# Altium PCB PCB_meu1oarm_2022-08-20.pcbdoc (part 1 of 2)
Units mil, origin at the board's own origin, x right, y up, seen from the top; angles counter-clockwise.
Board outline 4310.32 x 3211.34 mil, 2 copper layers (Top Layer, Bottom Layer); 105 components, 150 nets, 526 pads, 319 vias.
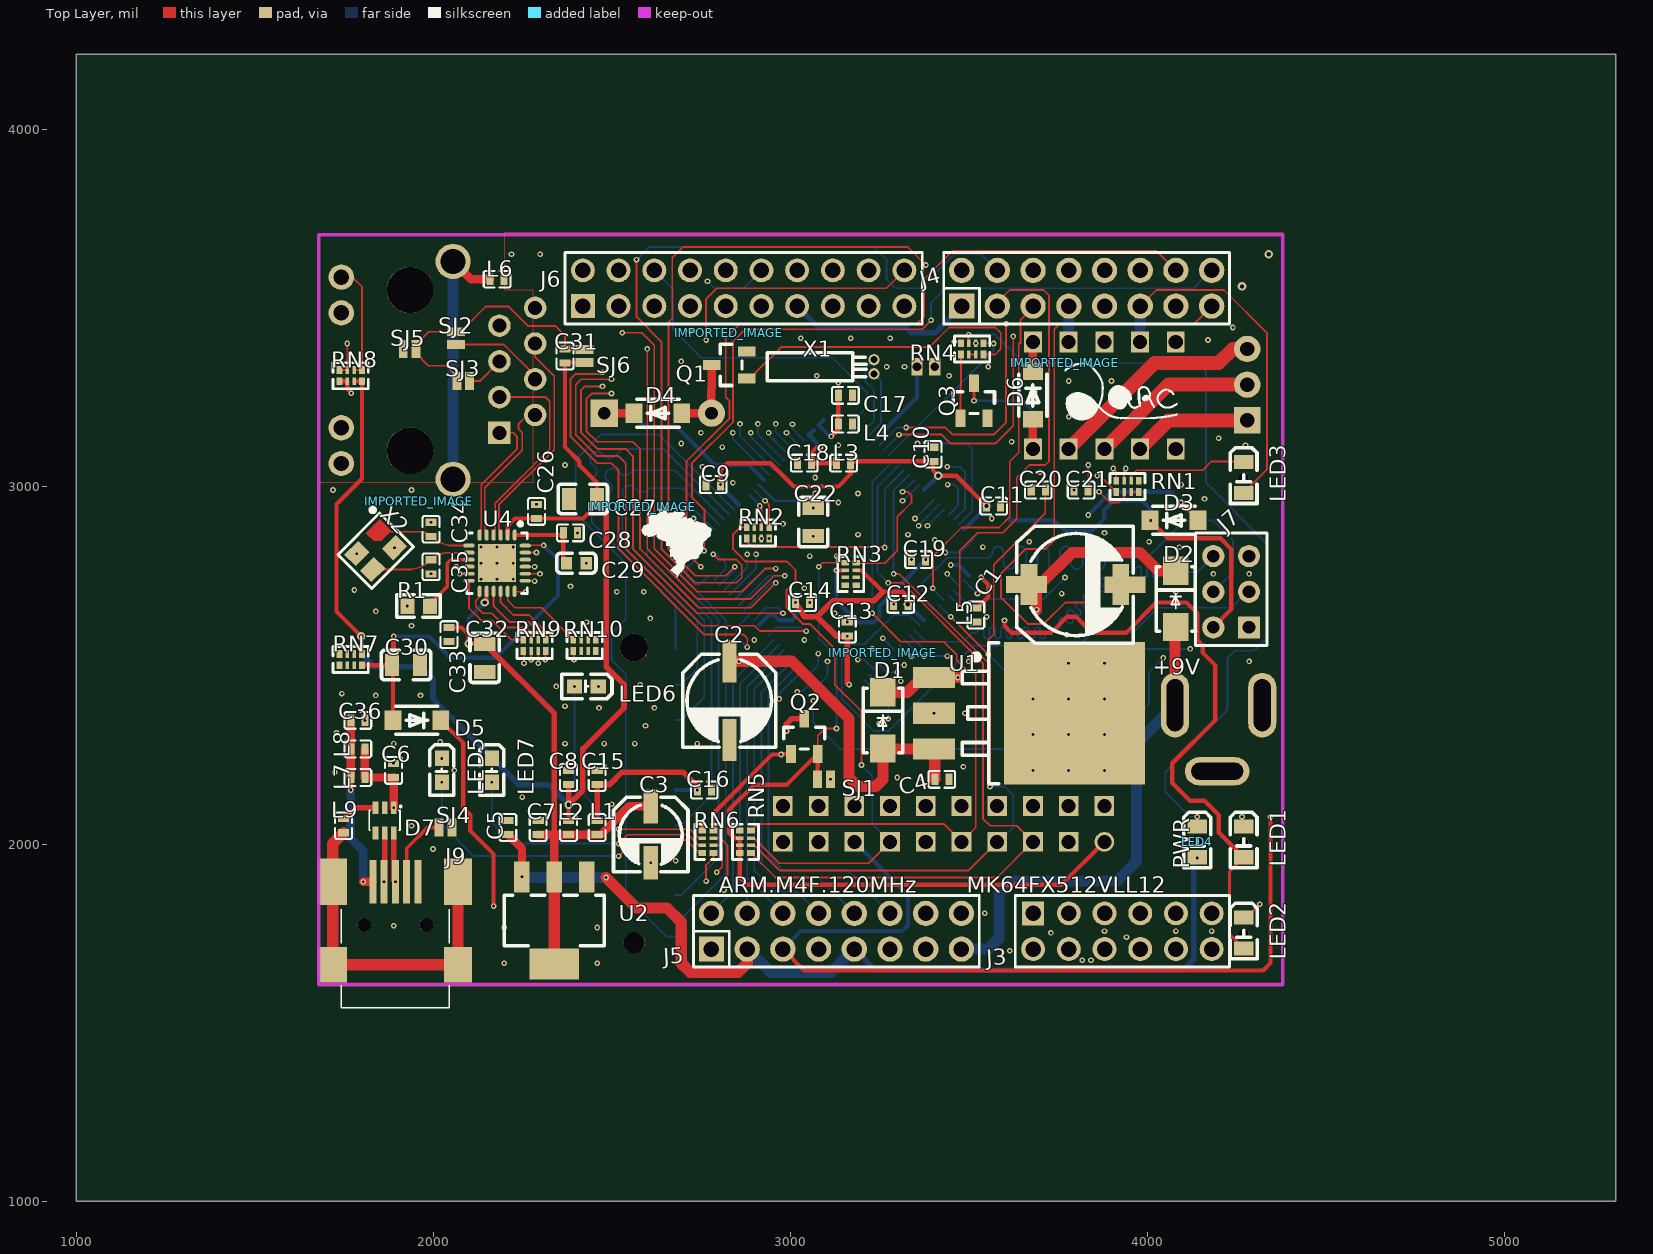
[diagram p0: Top Layer view]
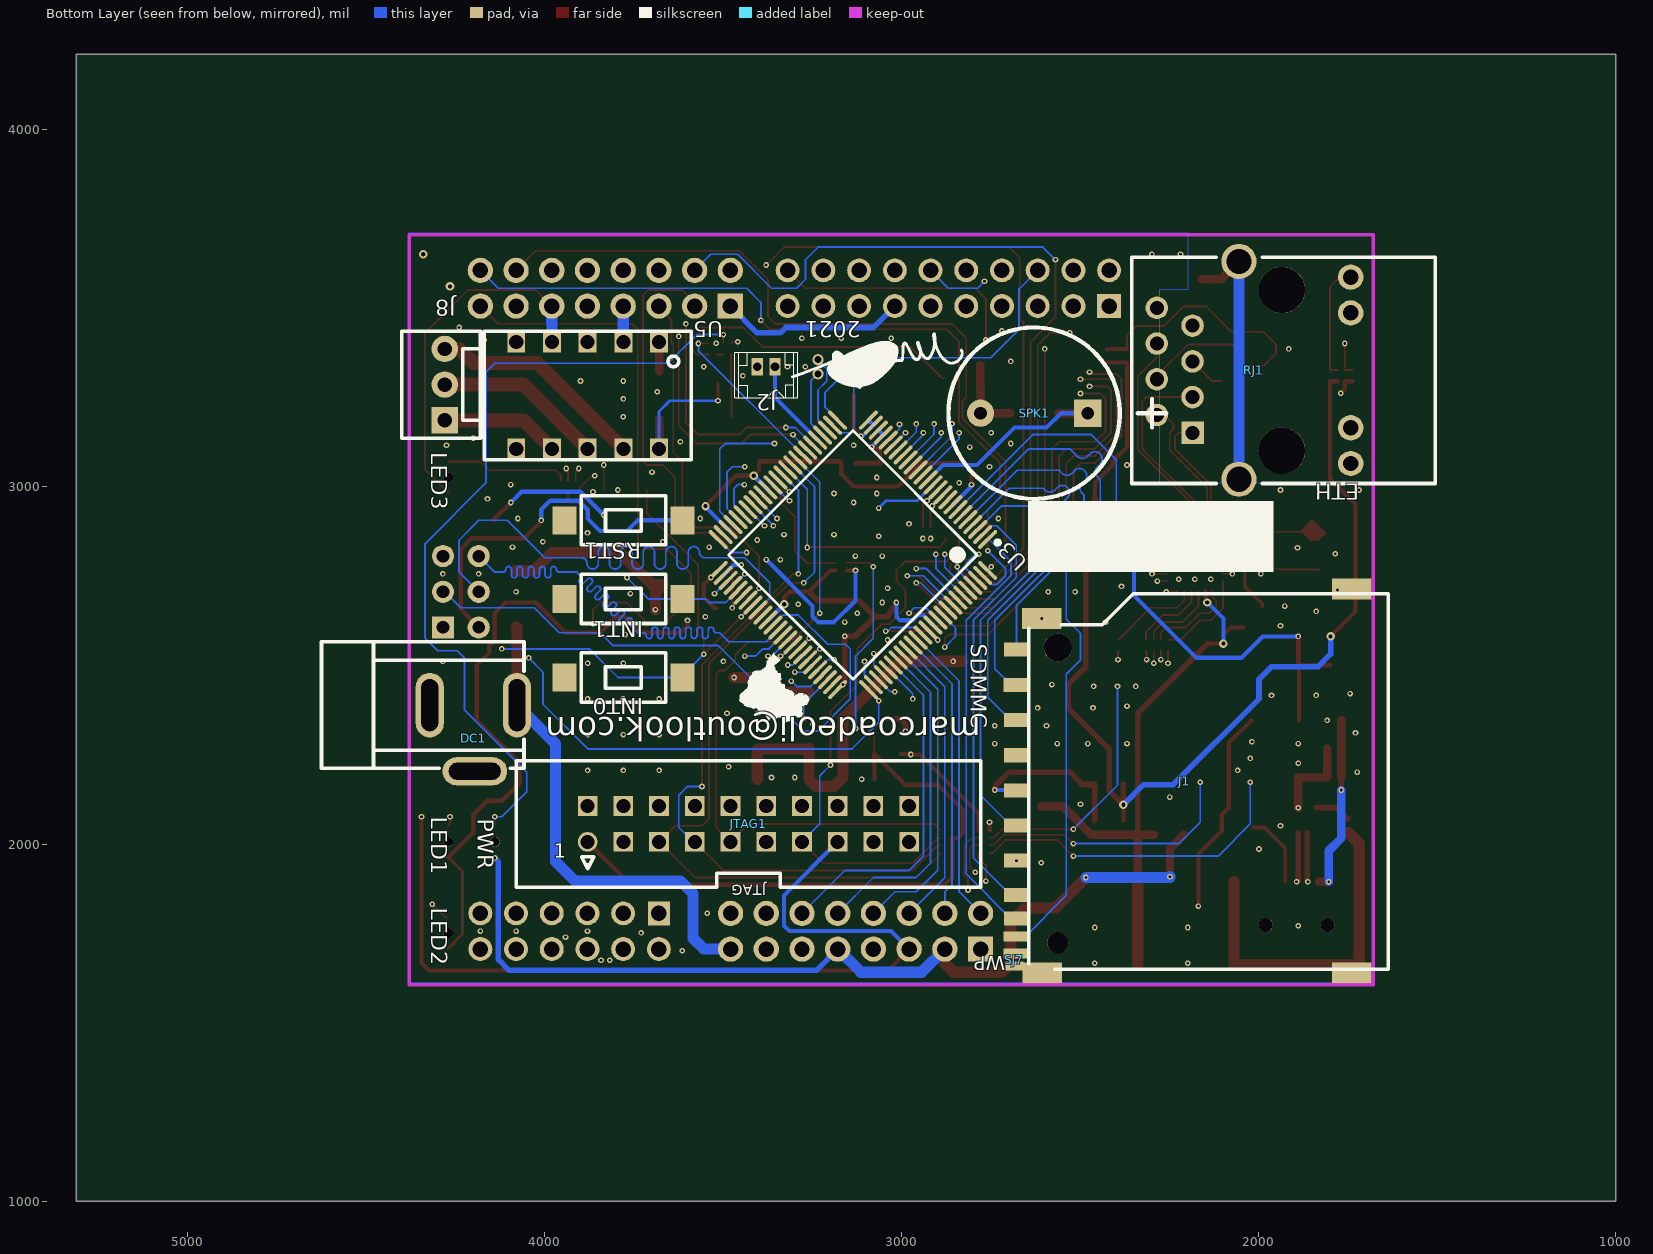
[diagram p1: Bottom Layer view, seen from below]

## Layer stack, top to bottom
Top Layer: signal copper (thickness not stored)
Dielectric: dielectric 12.6, FR-4, Dk 4.8
Bottom Layer: signal copper (thickness not stored)

## Board outline
5310.32,1000 1000,1000 1000,4211.34 5310.32,4211.34

## Components (designator, comment, footprint, x,y, rotation, side; value= is the part's Value field where it differs from the comment)
C1 "47uF/35V" CAP-SMD_BD8.0-L8.5-W8.5-FD 3798.47,2726.34 r0 top
C2 "220uF" CAP-SMD_BD6.3-L6.6-W6.6-FD 2828.47,2401.34 r270 top
C3 "330uF" CAP-SMD_BD5.0-L5.3-W5.3-FD 2608.47,2026.34 r270 top
C4 "100nF" C0402 3423.47,2181.34 r180 top
C5 "100nF" C0402 2208.47,2046.34 r270 top
C6 "100nF" C0402 1888.46,2206.34 r270 top
C7 "100nF" C0402 2293.47,2046.34 r270 top
C8 "100nF" C0402 2378.47,2186.34 r270 top
C9 "100nF" C0402 2783.47,3006.34 r0 top
C10 "100nF" C0402 3398.47,3091.34 r270 top
C11 "100nF" C0402 3568.47,2946.34 r180 top
C12 "100nF" C0402 3308.47,2671.34 r0 top
C13 "100nF" C0402 3158.78,2601.66 r270 top
C14 "100nF" C0402 3033.78,2676.34 r180 top
C15 "100nF" C0402 2458.47,2186.34 r270 top
C16 "100nF" C0402 2758.47,2151.34 r180 top
C17 "100nF" C0402 3153.47,3256.34 r0 top
C18 "100nF" C0402 3038.47,3066.34 r0 top
C19 "100nF" C0402 3358.47,2796.34 r0 top
C20 "100nF" C0402 3693.47,2991.34 r0 top
C21 "100nF" C0402 3813.47,2991.34 r0 top
C22 "10uF" C0805 3063.47,2901.34 r90 top
C26 "100nF" C0402 2288.78,2931.34 r270 top
C27 "22uF" C0805 2418.47,2966.34 r180 top
C28 "100nF" C0402 2383.47,2871.34 r0 top
C29 "2.2uF" C0603 2400.24,2786.14 r0 top
C30 "10uF" C0805 1923.46,2501.34 r0 top
C31 "100nF" C0402 2368.47,3366.34 r270 top
C32 "22uF" C0805 2143.47,2521.34 r90 top
C33 "100nF" C0402 2043.46,2586.34 r90 top
C34 "22pF" C0402 1993.46,2881.34 r270 top
C35 "22pF" C0402 1993.46,2776.34 r90 top
C36 "10nF" C0402 1788.46,2346.34 r180 top
D1 "1N4001" SMA_L4.4-W2.6-LS5.0-RD 3258.47,2346.34 r270 top
D2 "1N4001" SMA_L4.4-W2.6-LS5.0-RD 4078.47,2686.34 r270 top
D3 "1N4148W" SOD-123_L2.8-W1.8-LS3.7-RD 4073.47,2906.34 r0 top
D4 "1N4148W" SOD-123_L2.8-W1.8-LS3.7-RD 2628.47,3206.34 r0 top
D5 "1N4148W" SOD-123_L2.8-W1.8-LS3.7-RD 1953.46,2346.34 r180 top
D6 "1N4148W" SOD-123_L2.8-W1.8-LS3.7-RD 3678.47,3256.34 r270 top
D7 "SMF05CT1G" SOT-363_L2.0-W1.3-P0.65-LS2.1-TL 1863.46,2066.34 r270 top
DC1 "dc-005 5.5-2.0" DC-IN-TH_DC005 4198.47,2296.34 r0 bottom
IMPORTED_IMAGE "IMPORTED_IMAGE" IMPORTED_IMAGE 3258.37,2535.44 r0 top
IMPORTED_IMAGE "IMPORTED_IMAGE" IMPORTED_IMAGE 2826.24,3432.12 r0 top
IMPORTED_IMAGE "IMPORTED_IMAGE" IMPORTED_IMAGE 1958.78,2959.76 r0 top
IMPORTED_IMAGE "IMPORTED_IMAGE" IMPORTED_IMAGE 2583.37,2943.77 r0 top
IMPORTED_IMAGE "IMPORTED_IMAGE" IMPORTED_IMAGE 3768.04,3347.13 r0 top
INT0 "1TS002B-2500-4300 SMD Push" SW-SMD-3.5X6X4.3-A 3778.47,2466.34 r90 bottom
INT1 "1TS002B-2500-4300 SMD Push" SW-SMD-3.5X6X4.3-A 3778.47,2686.34 r90 bottom
J1 "HYC12-SD11-275" SD-SMD_HYC12-SD11-275 2208.47,2176.34 r270 bottom
J2 "53047-02" MOLEX_53047-0210_2PIN_VERT 3378.47,3336.34 r180 bottom
J3 "HEADER-FEMALE-2.54_2X6 COPY" HDR-TH_12P-P2.54-V-R2-C6-S2.54 3929.01,1756.03 r180 top
J4 "Header-Female-2.54_2x8" HDR-TH_16P-P2.54-V-R2-C8-S2.54 3828.97,3556.24 r0 top
J5 "Header-Female-2.54_2x8" HDR-TH_16P-P2.54-V-R2-C8-S2.54 3128.36,1756.04 r0 top
J6 "HEADER-FEMALE-2.54_2X10" HDR-TH_20P-P2.54-V-R2-C10-S2.54 2868.47,3556.24 r0 top
J7 "Header-Female-2.54_2x3" HDR-3X2/2.54 4233.47,2706.34 r90 top
J8 "M03POLAR" MOLEX-1X3 4278.47,3286.34 r270 bottom
J9 "DS1104-BN0SR" DS1104BN0SR 1893.46,1541.34 r0 top
JTAG1 "JTAG" 2X10_2.54MM_PTH 3428.47,2056.34 r0 bottom
L1 "18nH" L0402 2458.47,2046.34 r90 top
L2 "18nH" L0402 2378.47,2046.34 r90 top
L3 "18nH" L0402 3148.47,3066.34 r0 top
L4 "18nH" L0402 3153.47,3176.34 r0 top
L5 "18nH" L0402 3518.47,2641.34 r90 top
L6 "18nH" L0402 2178.47,3581.34 r180 top
L7 "18nH" L0402 1788.46,2186.34 r0 top
L8 "18nH" L0402 1788.46,2266.34 r0 top
L9 "18nH" L0402 1748.46,2051.34 r270 top
LED1 "XL-0805QBC" LED0805-RD 4268.47,2006.34 r270 top
LED2 "XL-0805QBC" LED0805-RD 4268.66,1751.33 r270 top
LED3 "XL-0805QBC" LED0805-RD 4268.47,3026.34 r270 top
LED4 "XL-0805QBC" LED0805-RD 4138.47,2006.34 r270 top
LED5 "0603White light_C2290" LED0603-R-RD 2023.46,2206.34 r270 top
LED6 "0603White light_C2290" LED0603-R-RD 2428.47,2441.34 r180 top
LED7 "0603White light_C2290" LED0603-R-RD 2163.47,2206.34 r270 top
Q1 "SS8050_C2150" SOT-23-3_L2.9-W1.3-P1.90-LS2.4-BR 2828.47,3341.34 r0 top
Q2 "SS8050_C2150" SOT-23-3_L2.9-W1.3-P1.90-LS2.4-BR 3038.47,2301.34 r270 top
Q3 "SS8050_C2150" SOT-23-3_L2.9-W1.3-P1.90-LS2.4-BR 3513.47,3241.34 r270 top
R1 "6.49K" R0603 1958.46,2666.34 r0 top
RJ1 "HR911105A_C12074" RJ45-TH_HR911105A 2013.46,3326.34 r270 bottom
RN1 "1K" RES-ARRAY-SMD_0402-8P-L2.0-W1.0-BL 3943.47,3001.34 r0 top
RN2 "33" RES-ARRAY-SMD_0402-8P-L2.0-W1.0-BL 2908.47,2871.34 r0 top
RN3 "10K" RES-ARRAY-SMD_0402-8P-L2.0-W1.0-BL 3168.47,2756.34 r270 top
RN4 "1K" RES-ARRAY-SMD_0402-8P-L2.0-W1.0-BL 3508.47,3386.34 r0 top
RN5 "10K" RES-ARRAY-SMD_0402-8P-L2.0-W1.0-BL 2873.47,2006.34 r90 top
RN6 "1K" RES-ARRAY-SMD_0402-8P-L2.0-W1.0-BL 2768.47,2006.34 r90 top
RN7 "10K" RES-ARRAY-SMD_0402-8P-L2.0-W1.0-BL 1768.46,2516.34 r0 top
RN8 "1K" RES-ARRAY-SMD_0402-8P-L2.0-W1.0-BL 1768.46,3311.34 r180 top
RN9 "33" RES-ARRAY-SMD_0402-8P-L2.0-W1.0-BL 2283.47,2556.34 r180 top
RN10 "33" RES-ARRAY-SMD_0402-8P-L2.0-W1.0-BL 2423.47,2556.34 r0 top
RST1 "1TS002B-2500-4300 SMD Push" SW-SMD-3.5X6X4.3-A 3778.47,2906.34 r90 bottom
SJ1 "JUMPER-PAD-2-NO" PAD-JUMPER-2-NO_NO_SILK#1 3093.47,2181.34 r0 top
SJ2 "JUMPER-PAD-2-NO" PAD-JUMPER-2-NO_NO_SILK#1 2063.47,3416.34 r270 top
SJ3 "JUMPER-PAD-2-NO" PAD-JUMPER-2-NO_NO_SILK#1 2083.47,3296.34 r0 top
SJ4 "ID" PAD-JUMPER-2-NO_NO_SILK#1 2033.46,2046.34 r180 top
SJ5 "JUMPER-PAD-2-NO" PAD-JUMPER-2-NO_NO_SILK#1 1933.46,3386.34 r180 top
SJ6 "JUMPER-PAD-2-NO" PAD-JUMPER-2-NO_NO_SILK#1 2423.47,3366.34 r270 top
SJ7 "JUMPER-PAD-2-NO" PAD-JUMPER-2-NO_NO_SILK#2 2683.78,1676.34 r270 bottom
SPK1 "BUZZER" BUZZER 2628.47,3206.34 r180 bottom
U1 "LM2940S-5.0/TR" ? 3598.47,2366.34 r180 top
U2 "AMS1117-3.3" SOT-223-3_L6.5-W3.4-P2.30-LS7.0-BR 2338.47,1786.34 r90 top
U3 "MK64FX512VLL12" LQFP-100_14X14X05P 2758.47,2766.34 r135 bottom
U4 "KSZ8081RNAIA-TR" QFN-24_L4.0-W4.0-P0.50-BL-EP2.6 2178.33,2786.39 r180 top
U5 "MQ2RC5V" MQ2RC 3828.42,3256.22 r90 bottom
X1 "32.768KHz" OSC-TH_BD2.0-P0.70-D0.3 3233.47,3336.34 r0 top
X2 "25MHz" OSC-SMD_4P-L3.2-W2.5-BL 1838.33,2821.39 r225 top

## Footprints (in the part's own frame and the unit in brackets; to place one, negate y for a bottom-side part, rotate by r counter-clockwise, add the part's x,y. Pads: shape width x height; smd on the part's side, far side on the other; paste and mask are expansions set on the pad)
2X10_2.54MM_PTH [mil]
  round 55.1 hole 39.4: 1(450,50)
  rect 55.1x55.1 hole 39.4: 2(450,-50) 3(350,50) 4(350,-50) 5(250,50) 6(250,-50) 7(150,50) 8(150,-50) 9(50,50) 10(50,-50) 11(-50,50) 12(-50,-50) 13(-150,50) 14(-150,-50) 15(-250,50) 16(-250,-50) 17(-350,50) 18(-350,-50) 19(-450,50) 20(-450,-50)
  silkscreen extent -650,-177 650,177
BUZZER [mil]
  rect 76x76 hole 36: 1(150,0)
  round 76 hole 36: 2(-150,0)
  silkscreen extent -240,-240 370,240
C0402 [mm]
  rect 0.5x0.8 smd: 1(-0.5,0) 2(0.5,0)
  silkscreen extent -0.95,-0.6 0.95,0.6
C0603 [mm]
  rect 0.8x0.9 smd: 1(-0.7,0) 2(0.7,0)
  silkscreen extent -1.4,-0.7 1.4,0.72
C0805 [mm]
  rect 1x1.55 smd: 1(-1,0) 2(1,0)
  silkscreen extent -1.75,-1.04 1.75,1.04
CAP-SMD_BD5.0-L5.3-W5.3-FD [mm]
  rect 2.4x1 smd: 1(-2,0) 2(2,0)
  silkscreen extent -2.65,-2.65 2.65,2.65
CAP-SMD_BD6.3-L6.6-W6.6-FD [mm]
  rect 3x1 smd: 1(-2.8,0) 2(2.8,0)
  silkscreen extent -3.3,-3.3 3.3,3.3
CAP-SMD_BD8.0-L8.5-W8.5-FD [mm]
  rect 2.9x1.2 smd: 1(-3.5,0.005) 2(3.5,-0.005)
  rect 1.2x2.9 smd: 1(-3.327,0) 2(3.2,0)
  silkscreen extent -4.21,-4.16 4.1,4.15
DC-IN-TH_DC005 [mm]
  oval 2x4.6 hole 1.2 slot 3.7 at 90 deg: 1(-3.1,-2.35) 2(3.1,-2.35)
  oval 4.6x2 hole 1.2 slot 3.7 at 0 deg: 3(-0.1,2.35)
  silkscreen extent -3.6,-6.85 10.8,2.15
DS1104BN0SR [mm]
  rect 0.5x3.1 smd: 1(-1.6,8.97) 2(-0.8,8.97) 3(0,8.97) 4(0.8,8.97) 5(1.6,8.97)
  rect 2x3.3 smd: 6(-4.45,8.97) 7(4.45,8.97)
  rect 2x2.5 smd: 8(-4.45,3.07) 9(4.45,3.07)
  round 1 hole 1 unplated: ""(-2.2,5.9) ""(2.2,5.9)
  silkscreen extent -3.85,0 3.85,7
HDR-3X2/2.54 [mil]
  rect 62x62 hole 35: 1(-100,-50)
  round 62 hole 35: 2(-100,50) 3(0,-50) 4(0,50) 5(100,-50) 6(100,50)
  silkscreen extent -150,-100 165,100
HDR-TH_12P-P2.54-V-R2-C6-S2.54 [mm]
  rect 1.575x1.7 hole 1.1: 1(6.35,-1.27)
  round 1.7 hole 1.1: 2(-6.35,1.27) 3(-3.81,-1.27) 4(-3.81,1.27) 5(-1.27,-1.27) 6(-1.27,1.27) 7(1.27,-1.27) 8(1.27,1.27) 9(3.81,-1.27) 10(3.81,1.27) 11(-6.35,-1.27) 12(6.35,1.27)
  silkscreen extent -7.62,-2.54 7.62,2.54
HDR-TH_16P-P2.54-V-R2-C8-S2.54 [mm]
  rect 1.8x1.8 hole 1.1: 1(-8.89,-1.27)
  round 1.8 hole 1.1: 2(-8.89,1.27) 3(-6.35,-1.27) 4(-6.35,1.27) 5(-3.81,-1.27) 6(-3.81,1.27) 7(-1.27,-1.27) 8(-1.27,1.27) 9(1.27,-1.27) 10(1.27,1.27) 11(3.81,-1.27) 12(3.81,1.27) 13(6.35,-1.27) 14(6.35,1.27) 15(8.89,-1.27) 16(8.89,1.27)
  silkscreen extent -10.16,-2.54 10.16,2.54
HDR-TH_20P-P2.54-V-R2-C10-S2.54 [mm]
  rect 1.7x1.7 hole 1.1: 1(-11.43,-1.27)
  round 1.7 hole 1.1: 2(-11.43,1.27) 3(-8.89,-1.27) 4(-8.89,1.27) 5(-6.35,-1.27) 6(-6.35,1.27) 7(-3.81,-1.27) 8(-3.81,1.27) 9(-1.27,-1.27) 10(-1.27,1.27) 11(1.27,-1.27) 12(1.27,1.27) 13(3.81,-1.27) 14(3.81,1.27) 15(6.35,-1.27) 16(6.35,1.27) 17(8.89,-1.27) 18(8.89,1.27) 19(11.43,-1.27) 20(11.43,1.27)
  silkscreen extent -12.7,-2.54 12.7,2.54
IMPORTED_IMAGE [mil]
L0402 [mm]
  rect 0.5x0.8 smd: 1(-0.5,0) 2(0.5,0)
  silkscreen extent -0.95,-0.6 0.95,0.6
LED0603-R-RD [mil]
  rect 43x39 smd: 1(33.5,0) 2(-33.5,0)
  silkscreen extent -72,-34 70,34
LED0805-RD [mm]
  rect 1x1.4 smd: 1(-1.1,0) 2(1.1,0)
  silkscreen extent -2.1,-0.95 1.85,0.95
LQFP-100_14X14X05P [mm]
  oval 1.8x0.28 smd: 1(1.55,1.55) 2(1.55,2.05) 3(1.55,2.55) 4(1.55,3.05) 5(1.55,3.55) 6(1.55,4.05) 7(1.55,4.55) 8(1.55,5.05) 9(1.55,5.55) 10(1.55,6.05) 11(1.55,6.55) 12(1.55,7.05) 13(1.55,7.55) 14(1.55,8.05) 15(1.55,8.55) 16(1.55,9.05) 17(1.55,9.55) 18(1.55,10.05) 19(1.55,10.55) 20(1.55,11.05) 21(1.55,11.55) 22(1.55,12.05) 23(1.55,12.55) 24(1.55,13.05) 25(1.55,13.55) 51(-13.55,13.55) 52(-13.55,13.05) 53(-13.55,12.55) 54(-13.55,12.05) 55(-13.55,11.55) 56(-13.55,11.05) 57(-13.55,10.55) 58(-13.55,10.05) 59(-13.55,9.55) 60(-13.55,9.05) 61(-13.55,8.55) 62(-13.55,8.05) 63(-13.55,7.55) 64(-13.55,7.05) 65(-13.55,6.55) 66(-13.55,6.05) 67(-13.55,5.55) 68(-13.55,5.05) 69(-13.55,4.55) 70(-13.55,4.05) 71(-13.55,3.55) 72(-13.55,3.05) 73(-13.55,2.55) 74(-13.55,2.05) 75(-13.55,1.55)
  oval 0.28x1.8 smd: 26(0,15.1) 27(-0.5,15.1) 28(-1,15.1) 29(-1.5,15.1) 30(-2,15.1) 31(-2.5,15.1) 32(-3,15.1) 33(-3.5,15.1) 34(-4,15.1) 35(-4.5,15.1) 36(-5,15.1) 37(-5.5,15.1) 38(-6,15.1) 39(-6.5,15.1) 40(-7,15.1) 41(-7.5,15.1) 42(-8,15.1) 43(-8.5,15.1) 44(-9,15.1) 45(-9.5,15.1) 46(-10,15.1) 47(-10.5,15.1) 48(-11,15.1) 49(-11.5,15.1) 50(-12,15.1) 76(-12,0) 77(-11.5,0) 78(-11,0) 79(-10.5,0) 80(-10,0) 81(-9.5,0) 82(-9,0) 83(-8.5,0) 84(-8,0) 85(-7.5,0) 86(-7,0) 87(-6.5,0) 88(-6,0) 89(-5.5,0) 90(-5,0) 91(-4.5,0) 92(-4,0) 93(-3.5,0) 94(-3,0) 95(-2.5,0) 96(-2,0) 97(-1.5,0) 98(-1,0) 99(-0.5,0) 100(0,0)
  silkscreen extent -12.25,0.75 2.05,13.8
MOLEX-1X3 [mil]
  rect 74x74 hole 40: 1(100,0)
  round 74 hole 40: 2(0,0) 3(-100,0)
  silkscreen extent -150,-120 150,100
MOLEX_53047-0210_2PIN_VERT [mil]
  rect 32x50 hole 24: 1(24.6,0) 2(-24.6,0)
  silkscreen extent -89,-87 89,39
MQ2RC [mm]
  rect 1.5x1.27 hole 1: 1(3.81,-3.81) 2(3.809,-1.27) 3(3.809,1.27) 4(3.809,3.81) 5(3.809,6.35) 6(-3.811,6.35) 7(-3.811,3.81) 8(-3.811,1.27) 9(-3.811,-1.27) 10(-3.81,-3.81)
  silkscreen extent -4.57,-6.1 4.57,8.64
OSC-SMD_4P-L3.2-W2.5-BL [mm]
  round 0 smd: 1(-1.1,-0.8)
  rect 1.4x1.15 smd: 2(1.1,-0.8) 3(1.1,0.8) 4(-1.1,0.8)
  Top Layer region: -1.8,-0.225 -0.762,-0.225 -0.4,-0.604 -0.4,-1.375 -1.8,-1.375
  silkscreen extent -2.1,-2.35 2.1,1.7
OSC-TH_BD2.0-P0.70-D0.3 [mm]
  round 0.8 hole 0.5: 1(0,0.5) 2(0,-0.5)
  silkscreen extent -7.6,-1 -0.54,1
PAD-JUMPER-2-NO_NO_SILK#1 [mil]
  rect 25x50 smd: 1(-18,0) 2(18,0)
PAD-JUMPER-2-NO_NO_SILK#2 [mil]
  rect 25x50 smd: 1(18,0) 2(-18,0)
QFN-24_L4.0-W4.0-P0.50-BL-EP2.6 [mm]
  oval 0.28x0.8 smd: 1(-1.25,-2) 2(-0.75,-2) 3(-0.25,-2) 4(0.25,-2) 5(0.75,-2) 6(1.25,-2) 13(1.25,2) 14(0.75,2) 15(0.25,2) 16(-0.25,2) 17(-0.75,2) 18(-1.242,2)
  oval 0.8x0.28 smd: 7(2,-1.25) 8(2,-0.75) 9(2,-0.25) 10(2,0.25) 11(2,0.75) 12(2,1.25) 19(-2,1.25) 20(-2,0.75) 21(-2,0.25) 22(-2,-0.25) 23(-2,-0.75) 24(-2,-1.25)
  rect 2.7x2.7 smd: 25(0.013,0)
  silkscreen extent -2.14,-3.05 2.16,2.15
R0603 [mm]
  rect 1x1.1 smd: 1(-0.8,0) 2(0.8,0)
  silkscreen extent -1.55,-0.8 1.55,0.81
RES-ARRAY-SMD_0402-8P-L2.0-W1.0-BL [mm]
  rect 0.4x0.55 smd: 1(-0.8,-0.4) 4(0.8,-0.4) 5(0.8,0.4) 8(-0.8,0.4)
  rect 0.25x0.55 smd: 2(-0.25,-0.4) 3(0.25,-0.4) 6(0.25,0.4) 7(-0.25,0.4)
  silkscreen extent -1.25,-0.92 1.25,0.92
RJ45-TH_HR911105A [mm]
  rect 1.6x1.6 hole 1: 1(4.445,-4.355)
  round 1.6 hole 1: 2(3.175,-6.895) 3(1.905,-4.355) 4(0.635,-6.895) 5(-0.635,-4.355) 6(-1.905,-6.895) 7(-3.175,-4.355) 8(-4.445,-6.895)
  round 1.8 hole 1.1: 9(6.625,6.895) 10(4.085,6.895) 11(-4.085,6.895) 12(-6.625,6.895)
  round 2.5 hole 1.8: SH1(7.745,-1.055) SH2(-7.745,-1.055)
  round 3.3 hole 3.3 unplated: ""(-5.715,1.995) ""(5.715,1.995)
  silkscreen extent -8.05,-8.68 8.05,12.92
SD-SMD_HYC12-SD11-275 [mm]
  rect 1x1.8 smd: 1(-6.847,-11.928) 2(-4.35,-11.927) 3(-1.837,-11.927) 4(0.655,-11.927) 5(3.158,-11.927) 6(5.66,-11.927) 7(8.092,-11.927) 8(9.778,-11.927) 9(-9.355,-11.927)
  rect 0.73x1.8 smd: 10(11.057,-11.928) 11(12.259,-11.928)
  rect 1.5x2.8 smd: 12(13.652,-10.102) 13(13.649,11.928) 14(-13.652,11.928) 15(-11.568,-10.124)
  round 2 hole 2 unplated: ""(-9.491,-8.976)
  round 1.5 hole 1.5 unplated: ""(11.497,-8.976)
  silkscreen extent -13.33,-11.04 13.37,14.51
SMA_L4.4-W2.6-LS5.0-RD [mm]
  rect 2x1.8 smd: 1(-2,0) 2(2,0)
  silkscreen extent -2.3,-1.4 2.3,1.4
SOD-123_L2.8-W1.8-LS3.7-RD [mm]
  rect 1.2x1.4 smd: 1(-1.7,0) 2(1.7,0)
  silkscreen extent -1.5,-1 1.5,1
SOT-23-3_L2.9-W1.3-P1.90-LS2.4-BR [mm]
  rect 1.25x0.7 smd: 1(1.25,-0.95) 2(1.25,0.95) 3(-1.25,0)
  silkscreen extent -0.65,-1.46 0.9,1.46
SOT-223-3_L6.5-W3.4-P2.30-LS7.0-BR [mm]
  rect 2.2x1.1 smd: 1(3.099,-2.3) 2(3.099,0) 3(3.099,2.3)
  rect 2.2x3.5 smd: 4(-3.099,0)
  silkscreen extent -1.8,-3.55 1.8,3.55
SOT-363_L2.0-W1.3-P0.65-LS2.1-TL [mm]
  rect 0.9x0.4 smd: 1(-0.9,0.65) 2(-0.9,0) 3(-0.9,-0.65) 4(0.9,-0.65) 5(0.9,0) 6(0.9,0.65)
  silkscreen extent -1.06,-1.1 0.7,1.21
SW-SMD-3.5X6X4.3-A [mm]
  rect 2x1.7 smd: A(0,-4.2) B(0,4.2)
  silkscreen extent -1.75,-3 1.75,3
? [mil]
  rect 118.5x59.5 smd: 1(197,-100) 2(197,0) 3(197,100)
  rect 394.5x398.5 smd: 4(-197,0)
  silkscreen extent 16,-197 118,197

## Free pads (board coordinates)
  round 27.56 hole 27.56 unplated: ""(4138.47,2006.34) ""(4268.47,1751.34) ""(4268.47,2006.34) ""(4268.47,3026.34)

## Via types
v1: diameter 15.75, hole 7.87, Top Layer to Bottom Layer, tented both sides, 310 vias
v2: diameter 23.62, hole 11.81, Top Layer to Bottom Layer, tented both sides, 7 vias
v3: diameter 24, hole 12, Top Layer to Bottom Layer, tented both sides, 2 vias

## Nets (pads, with @x,y where several pads share a name; then routed paths per layer and width w, separated by ;. In a path a pad name is that pad's centre, name@x,y a point inside that pad or via, vN(x,y) a via of type N, cw(c..) or ccw(c..) an arc to the next point about the centre after c; other vN are vias at no path point)
+3.3V: C3.1 C7.2 C32.2 C33.2 L1.1 L2.1 U2.2 U2.4 U4.14 | length 1626.9
  Top Layer w11.81: C33.2@2043.47,2606.02 2078.78,2606.03 2098.47,2586.34 v2(2098.47,2561.34) C32.2@2143.47,2560.71 ; v2(2143.47,2676.34) 2148.8,2681.68 U4.14@2148.81,2707.64
  Top Layer w15.75: C32.2@2143.47,2560.71 2338.84,2365.33 2338.84,2026.65
  Top Layer w23.62: C7.2@2293.47,2026.65 L2.1@2378.47,2026.65 L1.1@2458.47,2026.65 2468.76,2026.64 2548.47,2106.34 2608.47,2106.34 C3.1@2608.47,2105.04 ; U2.2@2338.47,1908.34 2338.86,2026.64
  Top Layer w31.5: U2.4@2338.47,1664.34 U2.2@2338.47,1908.34
  Bottom Layer w11.81: v2(2098.47,2561.34) 2098.47,2631.34 v2(2143.47,2676.34)
+3.3VM: C9.2 C10.2 C11.2 C12.2 C13.2 C14.2 C15.2 C16.2 J1.4 J4.1 J5.7 J6.13 L1.2 L3.2 LED1.2 LED2.2 Q2.3 RN3.7 SJ1.2 U3.8 U3.40 U3.48 U3.61 U3.75 U3.89 | length 8037.9
  Top Layer w7.87: LED1.2@4268.47,1963.04 4228.47,1923.04 4228.47,1748.24 LED2.2@4268.66,1708.03
  Top Layer w11.81: v1(2803.78,3006.34) 2803.76,3046.34 2823.76,3066.34 2943.76,3066.34 3008.76,3001.34 3133.76,3001.34 3168.17,3035.74 3168.17,3066.34 3173.45,3071.65 3398.47,3071.65 3398.47,3046.34 v2(3413.47,3031.34) 3463.76,3031.34 C11.2@3548.78,2946.34 ; RN3.7@3184.22,2766.18 3198.63,2766.18 3258.47,2706.34 3313.47,2706.34 3328.16,2691.65 v2(3328.16,2671.34) ; v1(3598.76,2626.34) 3598.76,2611.34 3618.76,2591.34 3728.76,2591.34 3773.76,2636.34 3798.76,2636.34 3843.76,2591.34 3938.76,2591.34 4023.76,2676.34 4108.76,2676.34 4138.76,2646.34 4138.76,2571.34 4153.76,2556.34 4153.76,2536.34 4188.76,2501.34 4188.76,2346.34 4068.76,2226.34 4068.76,2171.34 4118.76,2121.34 4158.76,2121.34 4198.76,2081.34 4198.76,2032.74 LED1.2@4268.47,1963.04
  Top Layer w15.75: L1.2@2458.47,2066.02 2458.47,2166.65 2493.77,2166.65 2528.47,2201.34 2698.47,2201.34 2738.77,2161.03 v1(2738.78,2151.34) ; v1(2988.47,2316.34) 2988.47,2336.34 3002.66,2350.54 Q2.3@3038.47,2350.54 ; v1(3014.09,2676.34) 3038.76,2636.34 3073.76,2636.34 ; v1(3163.78,2446.34) 3158.77,2451.34 v1(3158.78,2581.97) 3129.36,2581.94 3073.76,2636.34 ; 3258.47,2706.34 3233.47,2681.34 3118.76,2681.34 3073.76,2636.34
  Mid-Layer 1 w11.81: v1(2988.47,2316.34) 2998.77,2316.34 3053.77,2371.34 3088.77,2371.34 v1(3163.78,2446.34) ; v2(3548.47,2946.34) 3493.77,2891.65 3493.77,2831.34 3598.76,2726.35 v1(3598.76,2626.34)
  Mid-Layer 2 w11.81: v2(3413.47,3031.34) 3393.77,3051.03 3393.77,3151.34 3293.77,3251.34 3293.77,3371.34 3333.77,3411.34 3384.07,3411.34 J4.1@3478.97,3506.24
  Mid-Layer 2 w15.75: J5.7@3078.36,1706.04 3018.66,1646.34 2703.76,1646.34 2643.76,1706.34 2643.76,2056.34 v1(2738.78,2151.34) 2903.77,2316.34 v1(2988.47,2316.34) 3111.46,2193.34 v1(3111.47,2181.34) ; v2(3328.16,2671.34) 3398.77,2671.34 3423.77,2696.34 3478.77,2696.34 3508.77,2666.34 3578.77,2666.34 3598.76,2646.35 v1(3598.76,2626.34)
  Bottom Layer w11.81: J1.4@2678.07,2150.54 v1(2738.78,2151.34) ; v1@2803.16,3002.82 U3.8@2855.9,2950.07 ; U3.89@2911.59,2613.23 2939.67,2641.34 2953.76,2641.34 2968.76,2626.34 3003.76,2626.34 3014.07,2636.64 v1(3014.09,2676.34) ; v2(3328.16,2671.34) 3372.35,2627.15 U3.61@3373.7,2627.15 ; U3.40@3373.7,2991.83 v2(3413.47,3031.34) ; U3.48@3485.05,2880.48 3548.47,2943.88 v2(3548.47,2946.34)
  Bottom Layer w15.75: J6.13@3018.47,3506.24 3078.37,3446.34 3323.47,3446.34 3338.47,3431.34 3404.07,3431.34 J4.1@3478.97,3506.24
+3.3VP: C8.2 C26.2 C27.1 C31.2 L2.2 RN7.5 RN8.7 RN8.8 SJ6.2 U4.2 | length 3522.6
  Top Layer w11.81: RN8.7@1778.31,3295.59 RN8.8@1799.96,3295.59 1799.96,3022.84 1728.46,2951.34 1728.46,2651.34 v2(1798.46,2581.34) 1798.46,2533.59 RN7.5@1799.96,2532.09 ; U4.2@2207.86,2865.12 2207.86,2890.74 2228.47,2911.34 2418.47,2911.34 2457.84,2950.71 C27.1@2457.84,2966.34 2457.84,3011.66 2408.16,3061.34 2408.16,3071.65 2368.47,3111.34 2368.47,3346.65 2370.15,3348.34 SJ6.2@2423.47,3348.34 ; L2.2@2378.47,2066.02 v2(2378.47,2109.93)
  Top Layer w15.75: C8.2@2378.47,2166.65 v2(2378.47,2109.93) 2418.47,2149.94 2418.47,2266.34 2533.47,2381.34 2533.47,2446.34 2483.47,2496.34 2483.47,2921.34 2457.86,2946.94 C27.1@2457.86,2966.34
  Bottom Layer w15.75: v2(1798.46,2581.34) 1798.46,2531.64 1833.77,2496.34 1963.77,2496.34 1998.77,2461.34 1998.77,2406.34 2238.76,2166.34 2322.07,2166.34 v2(2378.47,2109.93)
+5V: C2.1 C4.2 C5.2 C6.2 D1.2 D4.1 D6.1 D7.1 J4.9 J5.3 J5.9 J7.5 L7.2 L8.2 LED4.2 SPK1.1 U1.3 U2.3 U3.13 U5.1 U5.3 | length 11753.5
  Top Layer w23.62: L8.2@1808.14,2266.34 L7.2@1808.14,2186.34 1888.46,2186.64 v1(1889.07,2101.74) ; C5.2@2208.47,2026.64 2247.97,1987.14 U2.3@2247.97,1908.34 ; SPK1.1@2478.47,3206.34 D4.1@2561.54,3206.34 ; D6.1@3678.47,3323.24 U5.1@3678.47,3406.24
  Top Layer w31.5: v1(2483.47,1906.34) 2568.47,1821.34 2653.76,1821.34 2693.76,1781.34 2693.76,1666.34 2718.76,1641.34 2853.76,1641.34 2878.37,1665.94 J5.3@2878.36,1706.04 ; C2.1@2828.47,2511.58 v1(2855.32,2511.58) ; v1@2855.27,2511.54 3003.56,2511.54 3163.47,2351.64 3163.47,2186.34 3188.47,2161.34 3238.47,2161.34 3258.47,2181.34 D1.2@3258.47,2267.6 ; D1.2@3258.47,2267.6 3259.72,2266.34 U1.3@3401.47,2266.34 3403.77,2264.03 C4.2@3403.78,2181.34
  Mid-Layer 1 w31.5: v1(1889.07,2101.74) 2054.51,2101.74 v1(2247.91,1908.34)
  Mid-Layer 2 w23.62: U5.1@3678.47,3406.24 3738.37,3346.34 3818.56,3346.34 U5.3@3878.47,3406.24 ; J4.9@3878.97,3506.24 U5.3@3878.47,3406.24 ; J7.5@4283.47,2806.34 4283.47,2881.64 4198.47,2966.64 4198.47,3086.14 U5.3@3878.47,3406.24
  Mid-Layer 2 w31.5: v1(1889.07,2101.74) 1938.46,2151.14 1938.46,2311.34 2063.47,2436.34 2283.76,2436.34 2353.47,2506.04 2353.47,2631.34 2478.47,2756.34 SPK1.1@2478.47,3206.34 2473.47,3206.34 2358.47,3321.34 2358.47,3631.34 2398.47,3671.34 3243.47,3671.34 3298.77,3671.34 4228.76,3671.34 4348.76,3551.34 4348.76,2871.64 J7.5@4283.47,2806.34 ; v1@2247.97,1908.34 2252.07,1908.34 v1@2855.27,2511.54
  Bottom Layer w11.81: SPK1.1@2478.47,3206.34 2553.47,3206.34 2593.47,3166.34 2683.47,3166.34 2788.47,3061.34 2866.38,3061.34 2883.86,3061.34 U3.13@2925.47,3019.64
  Bottom Layer w15.75: J5.9@3178.36,1706.04 3238.07,1646.34 4098.47,1646.34 4128.47,1676.34 4128.47,1951.34 v1(4138.47,1961.34)
  Bottom Layer w31.5: v1@2247.97,1908.34 2247.97,1906.34 v1(2483.47,1906.34) ; J5.3@2878.36,1706.04 2943.07,1641.34 3113.66,1641.34 J5.9@3178.36,1706.04
ADC00+: J3.4 U3.18 | length 2709.1
  Mid-Layer 1 w5: v1(2938.47,3151.34) 2938.47,3192.92 2966.89,3221.34 3377.86,3221.34 3413.47,3186.34 3836.36,2763.44 3836.36,1679.94 v1(3841.26,1674.94)
  Mid-Layer 2 w5: v1(3841.26,1674.94) 3833.86,1667.54 3833.86,1660.04 3841.26,1652.64 4109.16,1652.64 4121.57,1665.04 4121.57,1697.34 4112.86,1706.04 J3.4@4079.01,1706.03
  Bottom Layer w5: v1(2938.47,3151.34) 2938.47,3145.92 U3.18@2995.1,3089.27
ADC00-: J3.2 U3.19 | length 2698.7
  Mid-Layer 1 w5: v1(2958.47,3176.34) 2958.47,3196.34 2973.47,3211.34 3373.76,3211.34 3407.66,3177.44 3409.76,3175.54 3408.47,3176.34 ; 3408.17,3177.14 3823.96,2761.44 3823.96,1682.44 v1(3816.47,1674.94)
  Mid-Layer 2 w5: v1(3816.47,1674.94) 3823.86,1667.54 3823.86,1655.24 3838.76,1640.24 4114.16,1640.24 4133.96,1660.04 4133.96,1697.24 4142.66,1706.04 J3.2@4179.01,1706.03
  Bottom Layer w5: v1(2958.47,3176.34) 2958.47,3153.75 U3.19@3009.02,3103.19
ADC01+: J3.12 U3.14 | length 3083.7
  Mid-Layer 1 w5: v1(2838.47,3151.34) 2838.47,3231.34 2878.47,3271.34 3408.17,3271.34 3993.47,2686.04 3993.47,1907.24 4033.47,1867.24 4033.47,1746.34 4033.47,1683.64 3997.57,1647.64 3739.56,1647.64 3722.26,1665.04 3722.26,1694.84 3711.06,1706.04 J3.12@3679.01,1706.03
  Bottom Layer w5: v1(2838.47,3151.34) 2838.47,3134.55 U3.14@2939.42,3033.59
ADC01-: J3.10 U3.15 | length 2997.6
  Mid-Layer 1 w5: v1(2858.47,3176.34) 2858.47,3236.34 2883.47,3261.34 3403.47,3261.34 3983.47,2681.34 3983.47,1901.34 4023.47,1861.34 4023.47,1746.34 4023.47,1688.44 3992.66,1657.64 3746.06,1657.64 3732.26,1671.54 3732.26,1694.84 3743.37,1706.04 J3.10@3779.01,1706.03
  Bottom Layer w5: v1(2858.47,3176.34) 2858.47,3142.38 U3.15@2953.34,3047.51
ADC10+: J3.9 U3.20 | length 2043.6
  Mid-Layer 1 w5: v1(2988.47,3151.34) 2988.47,3181.34 3003.47,3196.34 3362.86,3196.34 3398.47,3161.34 3733.47,2827.04 3733.47,1815.04 3742.46,1806.04 J3.9@3779.01,1806.03
  Bottom Layer w5: v1(2988.47,3151.34) U3.20@3022.97,3117.14
ADC10-: J3.1 U3.21 | length 1985.6
  Mid-Layer 1 w5: v1@3005.43,3175.55 3016.22,3186.34 3358.47,3186.34 3393.47,3151.34 3723.47,2821.34 3723.47,1815.04 3714.36,1806.04 J3.1@3679.07,1806.04
  Bottom Layer w5: v1@3005.43,3175.55 3005.43,3162.46 U3.21@3036.86,3131.03
  other v1: 3005.43,3175.55
ADC11+: J3.8 U3.16 | length 2529.5
  Mid-Layer 1 w5: v1(2888.47,3151.34) 2888.47,3216.34 2918.47,3246.34 3393.47,3246.34 3952.46,2687.34 3952.46,1875.44 3933.47,1856.44 3933.47,1746.34 v1(3940.47,1739.44)
  Mid-Layer 2 w5: J3.8@3879.01,1706.03 3912.41,1739.44 v1(3940.47,1739.44)
  Bottom Layer w5: v1(2888.47,3151.34) 2888.47,3140.22 U3.16@2967.26,3061.43
ADC11-: J3.6 U3.17 | length 2476.1
  Mid-Layer 1 w5: v1(2908.47,3176.34) 2908.47,3221.34 2923.47,3236.34 3388.47,3236.34 3942.46,2682.34 3942.46,1880.34 3923.47,1861.34 3923.47,1721.94 3939.36,1706.04 J3.6@3979.01,1706.03
  Bottom Layer w5: v1(2908.47,3176.34) 2908.47,3148.06 U3.17@2981.18,3075.35
C29_1: C28.1 C29.1 U4.1 | length 228.8
  Top Layer w11.81: U4.1@2227.55,2865.12 2357.56,2865.12 C28.1@2363.78,2871.34 ; C28.1@2363.78,2871.34 2363.76,2798.44 C29.1@2375.86,2786.34
CRS_DV: RN9.2 U4.15 | length 219.4
  Top Layer w5: U4.15@2168.49,2707.64 2168.47,2666.34 2213.47,2621.34 2268.47,2621.34 2293.26,2596.14 RN9.2@2293.26,2572.04
D7_3: D7.3 L9.1 | length 102.2
  Top Layer w15.75: L9.1@1748.46,2071.03 1753.15,2071.03 1783.89,2101.77 D7.3@1837.88,2101.78
D+: D7.6 J9.3 RN2.3 | length 1859.9
  Top Layer w15.75: D7.6@1889.06,2030.91 1889.07,1898.89 v1(1893.46,1894.49)
  Mid-Layer 2 w5: v1@1893.46,1894.44 1883.46,1884.44 1883.46,1871.34 1898.46,1856.34 1969.37,1856.34 2108.47,1995.44 2108.47,2276.44 2183.36,2351.34 2534.36,2351.34 2923.47,2740.44 2923.47,2850.44 v1(2918.3,2855.59)
D-: D7.5 J9.2 RN2.4 | length 1896.7
  Top Layer w15.75: v1(1861.96,1894.49) 1863.47,1896 D7.5@1863.47,2030.91
  Mid-Layer 2 w5: v1@1861.97,1894.44 1873.46,1884.74 1873.46,1866.34 1893.46,1846.34 1978.07,1846.34 2119.96,1988.24 2119.96,2269.24 2187.07,2336.34 2440.63,2336.34 2538.07,2336.34 2934.96,2733.24 2934.96,2847.84 2939.96,2852.84 v1(2939.97,2855.59)
DAC0: J3.11 U3.27 | length 2288.7
  Mid-Layer 1 w5: v1(3133.47,3291.34) 3420.43,3291.34 4019.88,2691.89 4019.88,1965.16 J3.11@4179.01,1806.03
  Bottom Layer w5: v1(3133.47,3291.34) 3133.47,3161.64 3143.76,3151.34 3171.26,3151.34 U3.27@3192.77,3172.84
GND: C1.2 C2.2 C3.2 C4.1 C5.1 C6.1 C7.1 C8.1 C9.1 C10.1 C11.1 C12.1 C13.1 C14.1 C15.1 C16.1 C17.2 C18.1 C19.1 C20.1 C21.1 C22.1 C26.1 C27.2 C28.2 C29.2 C30.2 C32.1 C33.1 C34.1 C35.1 C36.1 D7.2 DC1.2 DC1.3 INT0.B INT1.B J1.3 J1.6 J1.12 J1.13 J1.14 J1.15 J2.2 J5.11 J5.13 J6.1 J6.3 J6.7 J6.8 J6.9 J7.1 J9.5 JTAG1.4 JTAG1.6 JTAG1.8 JTAG1.10 JTAG1.12 JTAG1.14 JTAG1.16 JTAG1.18 JTAG1.20 L4.2 L5.1 L6.1 LED5.2 LED6.2 LED7.2 Q1.2 Q3.2 R1.1 RJ1.8 RN1.5 RN4.6 RN5.5 RN8.5 RN8.6 RST1.B SJ4.1 SJ5.2 SJ7.1 U1.2 U1.4 U2.1 U3.9 U3.41 U3.49 U3.60 U3.74 U3.88 U4.22 U4.25 X2.2 X2.4 | length 673.4
  Top Layer w11.81: RN8.5@1736.97,3295.59 RN8.6@1758.62,3295.59 1758.63,3273.98 v1(1770.23,3262.36)
  Mid-Layer 1 w11.81: v1@1770.26,3262.34 1789.47,3262.34 2028.46,3501.34 RJ1.8@2284.96,3501.34
  other v1: 2198.47,1666.34 2458.47,1666.34 3613.78,1701.34 3728.78,1751.34 3878.78,1756.34 4078.78,1756.34 4178.77,1756.34 2198.47,1766.34 2458.47,1766.34 1888.78,1771.34 3543.78,1806.34 2608.47,1947.6 2678.03,1953.51 1998.78,1986.34 1938.78,2051.34 2498.47,2111.34 2248.78,2131.34 3298.78,2186.34 3363.78,2186.34 1723.78,2201.34 2058.78,2206.34 3678.47,2206.34 3778.47,2206.34 3878.47,2206.34 3483.78,2216.34 1888.46,2226.02 2023.46,2239.84 1888.78,2281.34 2368.47,2281.34 2478.47,2281.34 2563.78,2281.34 2738.78,2281.34 2018.78,2286.34 3678.47,2306.34 3778.47,2306.34 3878.47,2306.34 1728.78,2311.34 2593.78,2331.34 2738.78,2331.34 3248.47,2336.34 1808.14,2346.34 3401.47,2366.34 3488.47,2366.34 2463.78,2381.34 2618.78,2381.34 2368.47,2386.34 3678.47,2406.34 3778.47,2406.34 3878.47,2406.34 1963.78,2416.34 1743.78,2421.34 2343.78,2441.34 2461.97,2441.34 2578.78,2446.34 3778.47,2506.34 3878.47,2506.34 4283.77,2511.34 2898.47,2571.34 3038.78,2571.34 3773.47,2586.34 2428.47,2621.34 3158.78,2621.34 2607.03,2631.76 3548.78,2636.34 3123.78,2646.34 1926.97,2666.34 3288.78,2671.34 3053.78,2676.34 3758.78,2701.34 2513.78,2706.34 2588.78,2706.34 4078.78,2706.34 1778.78,2711.34 3038.78,2716.34 2383.78,2721.34 2133.47,2741.34 2178.47,2741.34 2223.47,2741.34 4183.77,2756.34 4283.77,2756.34 1993.46,2756.66 2133.47,2786.34 2178.47,2786.34 2223.47,2786.34 2427.8,2786.14 3338.78,2796.34 3053.78,2806.34 3128.78,2806.34 1785.44,2813.03 1891.23,2829.74 2133.47,2831.34 2178.47,2831.34 2223.47,2831.34 3538.47,2831.34 4088.78,2831.34 3668.47,2846.34 4003.78,2846.34 3403.78,2851.34 3063.47,2861.97 3188.78,2866.34 3328.78,2866.34 2403.16,2871.34 3878.78,2871.34 2978.78,2896.34 1993.46,2901.02 2728.47,2911.34 3563.47,2911.34 4073.78,2911.34 2288.78,2951.34 3133.78,2956.34 4158.77,2966.34 3068.78,2981.34 3188.78,2981.34 1718.78,2991.34 1938.78,2991.34 3793.78,2991.34 4093.78,3006.34 2838.47,3011.34 3068.78,3026.34 3698.47,3041.34 2753.47,3056.34 2368.47,3061.34 2808.78,3111.34 3133.78,3116.34 4273.77,3116.34 2693.78,3121.34 3618.78,3126.34 4198.47,3136.34 2748.78,3151.34 3778.78,3196.34 3778.47,3246.34 3683.78,3266.34 3778.78,3296.34 3898.47,3296.34 3073.47,3311.34 3443.78,3311.34 3268.78,3336.34 3318.78,3336.34 3553.47,3336.34 2693.78,3351.34 1915.46,3386.34 3518.3,3402.09 3028.47,3416.34 3168.47,3416.34 3278.78,3416.34 2718.78,3436.34 4238.47,3446.34 2218.78,3651.34 2298.78,3651.34
INTRP: RJ1.11 U4.18 | length 1366.9
  Top Layer w5: U4.18@2227.23,2707.64 2228.54,2706.34 v1(2258.47,2706.34)
  Mid-Layer 2 w5: RJ1.11@1741.97,3487.14 1833.46,3395.74 1833.46,2971.34 1878.46,2926.34 2303.47,2926.34 2333.47,2896.34 2333.47,2731.34 2308.47,2706.34 v1(2258.47,2706.34)
J1_11: J1.11 SJ7.2 | length 12.5
  Bottom Layer w5: J1.11@2678.09,1693.71 2682.46,1689.34 J1.11@2688.77,1689.34
J8_1: J8.1 U5.7 | length 333.2
  Top Layer w39.37: U5.7@3978.42,3106.2 4058.55,3186.34 J8.1@4278.47,3186.34
J8_2: J8.2 U5.8 | length 474.7
  Top Layer w39.37: U5.8@3878.42,3106.2 4058.55,3286.34 J8.2@4278.47,3286.34
J8_3: J8.3 U5.9 | length 616.1
  Top Layer w39.37: U5.9@3778.42,3106.2 4018.55,3346.34 4198.47,3346.34 4238.47,3386.34 J8.3@4278.47,3386.34
J9_1: C36.2 J9.1 L7.1 L8.1 | length 493.2
  Top Layer w15.75: v1(1768.78,2151.34) L7.1@1768.77,2186.34
  Top Layer w23.62: L7.1@1768.77,2186.34 L8.1@1768.77,2266.34 C36.2@1768.78,2346.34 ; v1(1803.46,1894.49) J9.1@1830.47,1894.49
  Bottom Layer w23.62: v1(1768.78,2151.34) 1768.78,2016.03 1803.46,1981.34 v1(1803.46,1894.49)
J9_6: J9.6 J9.7 J9.8 J9.9 L9.2 | length 964.6
  Top Layer w31.5: L9.2@1748.46,2031.66 1718.27,2001.46 J9.6@1718.27,1894.49 J9.8@1718.27,1662.21 J9.9@2068.66,1662.21 J9.7@2068.66,1894.49
JTAG1_5: JTAG1.5 RN5.1 U3.35 | length 2186.7
  Top Layer w5: RN5.1@2889.27,1974.84 2957.77,1906.34 3578.47,1906.34 JTAG1.5@3678.47,2006.34 3633.47,2051.34 3558.47,2051.34 3538.47,2071.34 3538.47,2506.34 3313.47,2731.34 v1(3273.47,2731.34)
  Bottom Layer w5: v1(3273.47,2731.34) 3243.47,2761.34 3243.47,3000.8 U3.35@3304.1,3061.43
JTAG1_7: JTAG1.7 RN5.2 U3.37 | length 1989.2
  Top Layer w5: RN5.2@2889.27,1996.54 2898.26,1996.54 2968.47,1926.34 3498.47,1926.34 JTAG1.7@3578.47,2006.34 ; v1(3288.47,2756.34) 3303.47,2756.34 3558.47,2501.34 v1(3558.47,2161.34)
  Bottom Layer w5: v1(3288.47,2756.34) 3288.47,2990.1 U3.37@3331.96,3033.59 ; v1(3558.47,2161.34) 3598.47,2161.34 3623.47,2136.34 3623.47,2046.34 3583.47,2006.34 JTAG1.7@3578.47,2006.34
JTAG1_9: JTAG1.9 RN5.4 U3.34 | length 1927.9
  Top Layer w5: RN5.4@2889.27,2037.84 2907.77,2056.34 3428.47,2056.34 JTAG1.9@3478.47,2006.34 3518.47,2046.34 3518.47,2476.64 3508.76,2486.34 3493.76,2486.34 3464.96,2515.14 3464.96,2529.84 3428.47,2566.34 3308.47,2566.34 v1(3228.47,2646.34)
  Bottom Layer w5: v1(3228.47,2646.34) 3228.47,3013.63 U3.34@3290.18,3075.35
JTAG1_19: JTAG1.19 RN6.5 | length 271.3
  Top Layer w11.81: RN6.5@2752.72,2037.84 v1(2753.47,2061.34)
  Mid-Layer 1 w11.81: v1(2753.47,2061.34) 2923.47,2061.34 JTAG1.19@2978.47,2006.34
L6_2: L6.2 RJ1.SH1 RJ1.SH2 | length 734.3
  Top Layer w23.62: RJ1.SH2@2055,3631.26 2104.93,3581.34 L6.2@2158.79,3581.34
  Bottom Layer w31.5: RJ1.SH1@2055,3021.42 RJ1.SH2@2055,3631.26
LED0: RJ1.9 U4.23 | length 722.1
  Top Layer w5: U4.23@2257.07,2815.91 v1(2288.47,2816.34)
  Mid-Layer 1 w5: RJ1.9@1742.01,3065.51 1846.16,2961.34 2213.47,2961.34 2288.47,2886.34 v1(2288.47,2816.34)
NA: J4.11 LED3.2 U5.4 | length 998.1
  Top Layer w5: J4.11@3978.97,3506.24 4024.07,3551.34 4213.47,3551.34 4333.47,3431.34 4333.47,3048.04 LED3.2@4268.47,2983.03
  Bottom Layer w31.5: U5.4@3978.47,3406.24 J4.11@3978.97,3506.24
NF: J4.7 U5.2 | length 100
  Bottom Layer w31.5: U5.2@3778.47,3406.24 J4.7@3778.97,3506.24
PTA2: RN2.1 U3.36 | length 645.3
  Top Layer w5: RN2.1@2876.97,2855.59 2876.97,2847.84 2893.47,2831.34 3262.41,2831.34 v1(3263.47,2830.28)
  Bottom Layer w5: v1@3263.47,2826.34 3263.47,2992.95 U3.36@3318.02,3047.51
PTA4: RN3.8 U3.38 | length 376.8
  Top Layer w5: RN3.8@3184.27,2787.84 3185.76,2786.34 3263.47,2786.34 3298.47,2821.34 3298.47,2916.34 3338.47,2956.34 3338.47,2976.34 3328.47,2986.34 v1(3313.47,2986.34)
  Bottom Layer w5: v1(3313.47,2986.34) 3345.87,3018.74 U3.38@3345.86,3019.67
PTA5: RN10.1 U3.39 | length 2031.5
  Top Layer w5: RN10.1@2392.07,2540.59 2393.47,2539.19 v1(2393.47,2516.34)
  Mid-Layer 1 w5: v1(2393.47,2516.34) 2428.47,2481.34 2623.47,2481.34 2656.51,2514.38 ccw(c2650.94,2519.95) 2656.51,2525.52 cw(c2662.08,2531.08) 2667.64,2536.65 2673.21,2531.09 2678.78,2525.52 ccw(c2684.35,2531.09) 2689.91,2536.65 2684.34,2542.22 2678.78,2547.79 cw(c2684.36,2553.35) 2689.91,2558.92 2695.48,2553.36 2701.05,2547.79 ccw(c2706.61,2553.37) 2712.18,2558.92 2706.62,2564.49 2701.05,2570.06 cw(c2706.63,2575.62) 2712.19,2581.19 2717.75,2575.63 2723.32,2570.06 ccw(c2728.88,2575.64) 2734.46,2581.2 2728.89,2586.76 2723.32,2592.33 cw(c2728.9,2597.89) 2734.46,2603.47 2740.02,2597.9 2745.59,2592.33 ccw(c2751.15,2597.91) 2756.73,2603.47 2751.16,2609.03 2745.59,2614.6 cw(c2751.17,2620.16) 2756.73,2625.74 2762.29,2620.17 2767.86,2614.6 ccw(c2773.42,2620.18) 2779,2625.74 2773.43,2631.31 2767.86,2636.87 cw(c2773.44,2642.43) 2779,2648.01 2784.56,2642.44 2790.14,2636.87 ccw(c2795.69,2642.45) 2801.27,2648.01 2795.7,2653.58 2790.14,2659.14 cw(c2795.71,2664.7) 2801.27,2670.28 2806.84,2664.71 2812.41,2659.14 ccw(c2817.96,2664.72) 2823.54,2670.28 2817.97,2675.85 ; 2817.98,2675.85 2812.41,2681.42 cw(c2817.97,2686.98) 2823.54,2692.55 2829.11,2686.98 2834.68,2681.42 ccw(c2840.23,2686.99) 2845.81,2692.55 2840.24,2698.12 2834.68,2703.69 cw(c2840.25,2709.24) 2845.81,2714.82 2851.38,2709.26 2856.95,2703.69 ccw(c2862.5,2709.26) 2868.08,2714.82 2862.51,2720.39 2856.95,2725.96 cw(c2862.52,2731.52) 2868.08,2737.09 2873.65,2731.53 ; 2873.65,2731.52 2879.22,2725.96 ccw(c2884.78,2731.53) 2890.35,2737.09 2884.78,2742.66 2879.22,2748.23 cw(c2884.8,2753.79) 2890.35,2759.36 2895.92,2753.8 ; 2895.93,2753.8 2901.49,2748.23 ccw(c2907.05,2753.81) 2912.62,2759.36 2907.06,2764.93 2901.49,2770.5 cw(c2907.07,2776.06) 2912.62,2781.63 2918.19,2776.07 2923.76,2770.5 ccw(c2929.32,2776.08) 2934.89,2781.64 2929.33,2787.2 ; 2929.32,2787.2 2923.76,2792.77 cw(c2929.34,2798.33) 2934.9,2803.91 2940.46,2798.34 2946.03,2792.77 ccw(c2951.59,2798.35) 2957.17,2803.91 2951.6,2809.47 ; 2951.59,2809.47 2946.03,2815.04 cw(c2951.61,2820.6) 2957.17,2826.18 2962.73,2820.61 2968.3,2815.04 ccw(c2973.87,2820.61) 2979.44,2826.18 2973.87,2831.74 2968.3,2837.31 cw(c2973.88,2842.87) 2979.44,2848.45 2985,2842.88 2990.57,2837.31 ccw(c2996.13,2842.89) 3001.71,2848.45 2996.14,2854.02 2990.57,2859.59 cw(c2996.15,2865.14) 3001.71,2870.72 3007.27,2865.15 3012.84,2859.59 ccw(c3018.4,2865.16) 3023.98,2870.72 3018.41,2876.29 3012.84,2881.86 cw(c3018.42,2887.41) 3023.98,2892.99 ccw(c3029.55,2898.56) 3035.11,2892.99 ; 3035.16,2893.04 3125.16,2893.04 3193.47,2961.34 v1(3313.47,2961.34)
  Bottom Layer w5: v1(3313.47,2961.34) 3315.37,2961.34 U3.39@3359.78,3005.75
PTA12: RN9.5 U3.42 | length 2076.8
  Top Layer w5: RN9.5@2251.97,2540.59 2253.47,2539.09 v1(2253.47,2506.34)
  Mid-Layer 1 w5: v1(2253.47,2506.34) 2253.47,2446.34 2293.47,2406.34 2683.47,2406.34 2729.94,2452.82 ccw(c2724.38,2458.39) 2729.95,2463.96 cw(c2735.52,2469.51) 2741.08,2475.09 2746.65,2469.52 2752.22,2463.96 ccw(c2757.77,2469.53) 2763.35,2475.09 2757.79,2480.66 2752.22,2486.23 cw(c2757.79,2491.79) 2763.35,2497.36 2768.92,2491.79 2774.49,2486.23 ccw(c2780.05,2491.8) 2785.62,2497.36 2780.06,2502.93 2774.49,2508.5 cw(c2780.07,2514.06) 2785.62,2519.63 2791.19,2514.07 2796.76,2508.5 ccw(c2802.32,2514.08) 2807.89,2519.63 2802.33,2525.2 2796.76,2530.77 cw(c2802.34,2536.33) 2807.89,2541.9 2813.46,2536.34 2819.03,2530.77 ccw(c2824.59,2536.35) 2830.16,2541.91 2824.6,2547.47 2819.03,2553.04 cw(c2824.61,2558.6) 2830.17,2564.18 2835.73,2558.61 2841.3,2553.04 ccw(c2846.86,2558.62) 2852.44,2564.18 2846.87,2569.74 2841.3,2575.31 cw(c2846.88,2580.87) 2852.44,2586.45 2858.01,2580.88 2863.57,2575.31 ccw(c2869.14,2580.88) 2874.71,2586.45 2869.14,2592.01 2863.57,2597.58 cw(c2869.15,2603.14) 2874.71,2608.72 2880.28,2603.15 2885.84,2597.58 ccw(c2891.4,2603.16) 2896.98,2608.72 2891.41,2614.29 2885.84,2619.85 cw(c2891.42,2625.41) 2896.98,2630.99 2902.55,2625.42 2908.11,2619.85 ccw(c2913.67,2625.43) 2919.25,2630.99 2913.68,2636.56 2908.11,2642.13 ; 2908.11,2642.12 cw(c2913.69,2647.68) 2919.25,2653.26 2924.82,2647.69 2930.38,2642.13 ccw(c2935.94,2647.7) 2941.52,2653.26 2935.95,2658.83 2930.38,2664.4 cw(c2935.96,2669.95) 2941.52,2675.53 2947.09,2669.96 2952.65,2664.4 ccw(c2958.21,2669.97) 2963.79,2675.53 2958.23,2681.1 2952.65,2686.67 cw(c2958.23,2692.22) 2963.79,2697.8 2969.36,2692.24 2974.93,2686.67 ; 2974.93,2708.94 2980.5,2703.37 2986.06,2697.8 cw(c2980.49,2692.24) 2974.93,2686.67 ; 2974.93,2708.94 cw(c2980.5,2714.5) 2986.06,2720.07 2991.63,2714.51 2997.2,2708.94 ccw(c3002.76,2714.52) 3008.33,2720.07 cw(c3013.9,2725.64) 3008.33,2731.21 3188.47,2911.34 v1(3348.47,2911.34)
  Bottom Layer w5: v1(3348.47,2911.34) 3401.12,2963.99 U3.42@3401.54,2963.99
PTA13: RN9.6 U3.43 | length 2116.8
  Top Layer w5: v1(2273.47,2516.34) 2273.47,2540.43 RN9.6@2273.62,2540.59
  Mid-Layer 1 w5: v1(2273.47,2516.34) 2273.47,2541.34 2258.47,2556.34 2233.47,2556.34 2218.47,2541.34 2218.47,2436.34 2298.47,2356.34 2753.47,2356.34 2786.46,2389.34 ccw(c2780.89,2394.9) 2786.46,2400.47 cw(c2792.04,2406.03) 2797.6,2411.61 2803.16,2406.04 2808.73,2400.47 ccw(c2814.29,2406.05) 2819.87,2411.61 2814.3,2417.18 ; 2814.3,2417.17 2808.73,2422.74 cw(c2814.31,2428.3) 2819.87,2433.88 2825.43,2428.31 2831,2422.74 ccw(c2836.56,2428.32) 2842.14,2433.88 2836.57,2439.45 ; 2836.57,2439.45 2831,2445.01 cw(c2836.58,2450.57) 2842.14,2456.15 2847.71,2450.58 2853.28,2445.01 ; 2853.27,2445.01 ccw(c2858.83,2450.59) 2864.41,2456.15 2858.84,2461.72 2853.28,2467.28 ; 2853.27,2467.28 cw(c2858.85,2472.84) 2864.41,2478.42 2869.98,2472.85 ; 2869.97,2472.85 2875.55,2467.28 ccw(c2881.1,2472.86) 2886.68,2478.42 2881.11,2483.99 2875.55,2489.55 cw(c2881.12,2495.11) 2886.68,2500.69 2892.25,2495.12 2897.82,2489.55 ccw(c2903.37,2495.13) 2908.95,2500.69 2903.38,2506.26 2897.82,2511.83 cw(c2903.38,2517.39) 2908.95,2522.96 2914.52,2517.39 2920.09,2511.83 ccw(c2925.65,2517.4) 2931.22,2522.96 2925.66,2528.53 2920.09,2534.1 cw(c2925.67,2539.66) 2931.22,2545.23 2936.79,2539.66 2942.36,2534.1 ccw(c2947.92,2539.68) 2953.49,2545.23 2947.93,2550.8 ; 2947.92,2550.8 2942.36,2556.37 cw(c2947.94,2561.93) 2953.49,2567.5 2959.06,2561.94 2964.63,2556.37 ccw(c2970.19,2561.95) 2975.76,2567.51 cw(c2981.33,2573.07) 2975.76,2578.64 3028.77,2631.34 3078.77,2631.34 3089.07,2641.64 3089.07,2691.95 3288.47,2891.34 v1(3358.47,2891.34)
  Bottom Layer w5: v1(3358.47,2891.34) 3358.47,2893.07 U3.43@3415.46,2950.07
PTA14: RN9.7 U3.44 | length 2023
  Top Layer w5: RN9.7@2293.31,2540.59 2293.47,2540.43 v1(2293.47,2506.34)
  Mid-Layer 1 w5: v1(2293.47,2506.34) 2293.47,2551.34 2263.47,2581.34 2208.47,2581.34 2188.47,2561.34 2188.47,2416.34 2298.47,2306.34 2813.47,2306.34 2850.73,2343.6 ccw(c2845.15,2349.16) 2850.72,2354.73 cw(c2856.3,2360.29) 2861.86,2365.87 2867.43,2360.3 2872.99,2354.73 ccw(c2878.55,2360.31) 2884.13,2365.87 2878.56,2371.43 2872.99,2377 cw(c2878.56,2382.57) 2884.13,2388.14 2889.7,2382.57 2895.26,2377 ccw(c2900.82,2382.58) 2906.4,2388.14 2900.83,2393.71 2895.26,2399.27 cw(c2900.84,2404.83) 2906.4,2410.41 ccw(c2911.97,2415.98) 2917.53,2410.41 3383.47,2876.34 v1(3383.47,2891.34)
  Bottom Layer w5: v1(3383.47,2891.34) 3428.28,2936.15 U3.44@3429.38,2936.15
PTA15: U3.45 U4.19 | length 2085
  Top Layer w5: U4.19@2257.07,2737.14 v1(2283.47,2736.34)
  Mid-Layer 1 w5: v1(2283.47,2736.34) 2358.47,2661.34 2678.47,2661.34 2702.35,2685.22 ccw(c2696.77,2690.78) 2702.34,2696.35 cw(c2707.92,2701.91) 2713.48,2707.49 2719.05,2701.92 2724.61,2696.35 ccw(c2730.17,2701.93) 2735.75,2707.49 2730.18,2713.05 ; 2730.17,2713.05 2724.61,2718.62 cw(c2730.19,2724.18) 2735.75,2729.76 2741.32,2724.19 2746.88,2718.62 ccw(c2752.44,2724.2) 2758.02,2729.76 2752.45,2735.32 ; 2752.45,2735.33 2746.88,2740.89 cw(c2752.46,2746.45) 2758.02,2752.03 2763.59,2746.46 2769.15,2740.89 ccw(c2774.71,2746.47) 2780.29,2752.03 2774.72,2757.59 2769.15,2763.16 cw(c2774.72,2768.73) 2780.29,2774.3 2785.86,2768.73 2791.42,2763.16 ccw(c2796.98,2768.74) 2802.56,2774.3 2796.99,2779.87 2791.42,2785.43 ; 2791.43,2785.43 cw(c2797,2790.99) 2802.56,2796.57 2808.13,2791 ; 2808.12,2791 2813.69,2785.43 ccw(c2819.25,2791.01) 2824.83,2796.57 2819.26,2802.14 2813.69,2807.71 cw(c2819.27,2813.26) 2824.83,2818.84 2830.4,2813.27 2835.97,2807.71 ccw(c2841.52,2813.28) 2847.1,2818.84 2841.54,2824.41 2835.97,2829.98 cw(c2841.54,2835.54) 2847.1,2841.11 2852.67,2835.54 2858.24,2829.98 ccw(c2863.8,2835.55) 2869.37,2841.11 2863.81,2846.68 2858.24,2852.25 cw(c2863.82,2857.81) 2869.37,2863.38 2874.94,2857.82 2880.51,2852.25 ccw(c2886.07,2857.83) 2891.64,2863.38 2886.08,2868.95 2880.51,2874.52 cw(c2886.09,2880.08) 2891.64,2885.65 2897.21,2880.09 2902.78,2874.52 ccw(c2908.35,2880.09) 2913.92,2885.65 2908.35,2891.22 2902.78,2896.79 cw(c2908.36,2902.35) 2913.92,2907.93 2919.48,2902.36 2925.05,2896.79 ccw(c2930.61,2902.37) 2936.19,2907.93 2930.62,2913.49 2925.05,2919.06 cw(c2930.63,2924.62) 2936.19,2930.2 2941.76,2924.63 2947.32,2919.06 ccw(c2952.88,2924.64) 2958.46,2930.2 2952.89,2935.76 2947.32,2941.33 cw(c2952.9,2946.89) 2958.46,2952.47 2964.03,2946.9 2969.59,2941.33 ccw(c2975.15,2946.91) 2980.73,2952.47 2975.16,2958.04 2969.59,2963.6 cw(c2975.17,2969.16) 2980.73,2974.74 ccw(c2986.3,2980.31) 2991.86,2974.74 3023.47,3006.34 v1(3439.59,3006.34)
  Bottom Layer w5: v1(3439.59,3006.34) 3458.47,3006.34 3468.47,2996.34 3468.47,2947.4 U3.45@3443.3,2922.34